# EAGLE board CT_schematic (EAGLE 7.6.0)

Size 100 x 80 mm. Coordinates in mm from the lower left corner, seen from the top.
Outline: 0,0 100,0 100,80 0,80 0,0
Copper layers (1*16): Top 0.035mm / dielectric 1.5mm / Bottom 0.035mm
Design rules "default": minimum track width 10mil, minimum drill 24mil, track to track 8mil, track to pad 8mil, pad to pad 8mil, via to via 8mil, smd to smd 8mil, copper to edge 40mil, drill to drill 8mil, minimum pad ring 10mil, minimum via ring 8mil, stop-mask expansion 4mil, vias tented up to drill 0mil, thermal gap 10mil

## Footprints (pad centres in the part's own frame; a part is rotated, then mirrored left to right if it is on the bottom)
C0603 = smd 0.8 x 0.8: 1 -0.762,0; 2 0.762,0
C0402 = smd 0.5 x 0.5: 1 -0.508,0; 2 0.508,0
EXV-9B = smd 2.718 x 1.778: 1 -2.108,0; 2 2.108,0
EXV-9H = smd 3.505 x 1.676: 1 -2.857,0; 2 2.857,0
L0603 = smd 0.8 x 0.8: 1 -0.762,0; 2 0.762,0
PJ-037B_PACKAGE = drill 3.7 square: 1 12,0 | drill 3.2 square: 2 6,0
R0603 = smd 0.8 x 0.8: 1 -0.762,0; 2 0.762,0
TFBGA64 = smd 0.35 x 0.35: A1 -1.75,1.75; A2 -1.25,1.75; A3 -0.75,1.75; A4 -0.25,1.75; A5 0.25,1.75; A6 0.75,1.75; A7 1.25,1.75; A8 1.75,1.75; B1 -1.75,1.25; B2 -1.25,1.25; B3 -0.75,1.25; B4 -0.25,1.25; B5 0.25,1.25; B6 0.75,1.25; B7 1.25,1.25; B8 1.75,1.25; C1 -1.75,0.75; C2 -1.25,0.75; C3 -0.75,0.75; C4 -0.25,0.75; C5 0.25,0.75; C6 0.75,0.75; C7 1.25,0.75; C8 1.75,0.75; D1 -1.75,0.25; D2 -1.25,0.25; D3 -0.75,0.25; D4 -0.25,0.25; D5 0.25,0.25; D6 0.75,0.25; D7 1.25,0.25; D8 1.75,0.25; E1 -1.75,-0.25; E2 -1.25,-0.25; E3 -0.75,-0.25; E4 -0.25,-0.25; E5 0.25,-0.25; E6 0.75,-0.25; E7 1.25,-0.25; E8 1.75,-0.25; F1 -1.75,-0.75; F2 -1.25,-0.75; F3 -0.75,-0.75; F4 -0.25,-0.75; F5 0.25,-0.75; F6 0.75,-0.75; F7 1.25,-0.75; F8 1.75,-0.75; G1 -1.75,-1.25; G2 -1.25,-1.25; G3 -0.75,-1.25; G4 -0.25,-1.25; G5 0.25,-1.25; G6 0.75,-1.25; G7 1.25,-1.25; G8 1.75,-1.25; H1 -1.75,-1.75; H2 -1.25,-1.75; H3 -0.75,-1.75; H4 -0.25,-1.75; H5 0.25,-1.75; H6 0.75,-1.75; H7 1.25,-1.75; H8 1.75,-1.75
SOIC-8 = smd 1.6 x 0.6: 1 -2.7,1.905 | smd 1.55 x 0.6: 2 -2.7,0.635; 3 -2.7,-0.635; 4 -2.7,-1.905; 5 2.7,-1.905; 6 2.7,-0.635; 7 2.7,0.635; 8 2.7,1.905
MBH7BLZ02-109004 = smd 0.5 x 0.5: 1 0,0; 15 9.85,0; 27 9.85,8.45; 41 0,8.45 | smd 0.45 x 0.5: 2 0.725,0; 3 1.425,0; 4 2.125,0; 5 2.825,0; 6 3.525,0; 7 4.225,0; 8 4.925,0; 9 5.625,0; 10 6.325,0; 11 7.025,0; 12 7.725,0; 13 8.425,0; 14 9.125,0 | smd 0.5 x 0.45: 16 9.85,0.725; 17 9.85,1.425; 18 9.85,2.125; 19 9.85,2.825; 20 9.85,3.525; 21 9.85,4.225; 22 9.85,4.925; 23 9.85,5.625; 24 9.85,6.325; 25 9.85,7.025; 26 9.85,7.725; 28 9.15,8.45; 29 8.45,8.45; 30 7.75,8.45; 31 7.05,8.45; 32 6.35,8.45; 33 5.65,8.45; 34 4.95,8.45; 35 4.25,8.45; 36 3.55,8.45; 37 2.85,8.45; 38 2.15,8.45; 39 1.45,8.45; 40 0.75,8.45; 42 0,7.75; 43 0,7.05; 44 0,6.35; 45 0,5.65; 46 0,4.95; 47 0,4.25; 48 0,3.55; 49 0,2.85; 50 0,2.15; 51 0,1.45; 52 0,0.75 | smd 3 x 2.5: 53 3.225,2.775; 54 6.625,2.775; 55 6.625,5.675; 56 3.225,5.675
DFN8-S = smd 0.6 x 0.4: 1 -2.69,1.905; 2 -2.69,0.635; 3 -2.69,-0.635; 4 -2.69,-1.905; 5 2.69,-1.905; 6 2.69,-0.635; 7 2.69,0.635; 8 2.69,1.905
ASEK = smd 1.4 x 1: 1 -1.1,-0.8; 2 1.1,-0.8; 3 1.1,0.8; 4 -1.1,0.8
ASFL1 = smd 1.7 x 1.5: 1 -1.27,-1.1; 2 1.27,-1.1; 3 1.27,1.1; 4 -1.27,1.1
LP2954 = smd 1.6 x 0.6: 1 -2.475,1.905 | smd 1.55 x 0.6: 2 -2.475,0.635; 3 -2.475,-0.635; 4 -2.475,-1.905; 5 2.475,-1.905; 6 2.475,-0.635; 7 2.475,0.635; 8 2.475,1.905
SON-6 = smd 0.55 x 0.3: 1 -0.355,0.5 | smd 0.52 x 0.3: 2 -0.37,0; 3 -0.37,-0.5; 4 0.37,-0.5; 5 0.37,0; 6 0.37,0.5
SW_4-1437565-2 = smd 1.4 x 2.1: 1 -2.23,4.55; 2 -2.23,-4.55; 3 2.23,4.55; 4 2.23,-4.55
LGM67K-G1J2-24-Z = smd 0.8 x 1.4: A -2,0; C 0,0
NC7SZ125M5X = smd 1.3 x 0.7: 1 -1.3,0.95; 2 -1.3,0; 3 -1.3,-0.95; 4 1.3,-0.95; 5 1.3,0.95

## Placement (x,y rotation side)
C1  1e-07  [C0603]  -38.1,59.69 0 top  (outside the outline)
C2  1e-07  [C0603]  -41.91,59.69 0 top  (outside the outline)
C3  1e-07  [C0603]  -45.72,59.69 0 top  (outside the outline)
C4  1e-07  [C0603]  -49.53,59.69 0 top  (outside the outline)
C5  4.7e-06  [C0603]  -34.29,59.69 0 top  (outside the outline)
C6  1e-07  [C0603]  -53.34,59.69 0 top  (outside the outline)
C7  1e-08  [C0603]  -57.15,59.69 0 top  (outside the outline)
C8  1e-06  [C0603]  -60.96,59.69 0 top  (outside the outline)
C9  1e-08  [C0402]  -41.91,64.77 0 top  (outside the outline)
C10  1e-07  [C0402]  -45.72,64.77 0 top  (outside the outline)
C11  1e-07  [C0402]  -49.53,64.77 0 top  (outside the outline)
C12  1e-08  [C0402]  -53.34,64.77 0 top  (outside the outline)
C13  1e-08  [C0402]  -57.15,64.77 0 top  (outside the outline)
C14  1e-08  [C0402]  -60.96,64.77 0 top  (outside the outline)
C15  1e-06  [EXV-9B]  -30.48,46.99 0 top  (outside the outline)
C16  2.2e-06  [EXV-9B]  -39.37,46.99 0 top  (outside the outline)
C17  1e-07  [C0402]  -64.77,64.77 0 top  (outside the outline)
C18  0.0001  [EXV-9H]  -38.1,40.64 0 top  (outside the outline)
C19  0.0001  [EXV-9H]  -49.53,40.64 0 top  (outside the outline)
C20  1e-08  [C0402]  -15.24,69.85 0 top  (outside the outline)
C21  1e-08  [C0402]  -19.05,69.85 0 top  (outside the outline)
F1  240.0  [L0603]  -15.24,64.77 0 top  (outside the outline)
J1  PJ-037B  [PJ-037B_PACKAGE]  -27.94,7.62 0 top  (outside the outline)
R2  1000.0  [R0603]  -19.05,64.77 0 top  (outside the outline)
R4  4700.0  [R0603]  -22.86,64.77 0 top  (outside the outline)
R5  4700.0  [R0603]  -26.67,64.77 0 top  (outside the outline)
R6  2200.0  [R0603]  -30.48,64.77 0 top  (outside the outline)
R7  2200.0  [R0603]  -34.29,64.77 0 top  (outside the outline)
R8  10000.0  [R0603]  -40.64,54.61 0 top  (outside the outline)
R9  10000.0  [R0603]  -45.72,54.61 0 top  (outside the outline)
R10  10000.0  [R0603]  -50.8,54.61 0 top  (outside the outline)
R11  10000.0  [R0603]  -55.88,54.61 0 top  (outside the outline)
R12  10000.0  [R0603]  -60.96,54.61 0 top  (outside the outline)
R13  10000.0  [R0603]  -15.24,59.69 0 top  (outside the outline)
R14  10000.0  [R0603]  -20.32,59.69 0 top  (outside the outline)
R15  100000.0  [R0603]  -15.24,54.61 0 top  (outside the outline)
R16  100000.0  [R0603]  -20.32,54.61 0 top  (outside the outline)
R17  164658.62  [R0603]  -60.96,46.99 0 top  (outside the outline)
R18  100000.0  [R0603]  -25.4,54.61 0 top  (outside the outline)
R19  10000.0  [R0603]  -25.4,59.69 0 top  (outside the outline)
R20  10000.0  [R0603]  -30.48,59.69 0 top  (outside the outline)
R21  9100.0  [R0603]  -38.1,64.77 0 top  (outside the outline)
R22  680000.0  [R0603]  -30.48,54.61 0 top  (outside the outline)
R23  120000.0  [R0603]  -35.56,54.61 0 top  (outside the outline)
U1  STM32L152R8H6A  [TFBGA64]  -58.42,19.05 0 top  (outside the outline)
U2  AT25160B-SSHL-T  [SOIC-8]  -41.91,31.75 0 top  (outside the outline)
U3  MBH7BLZ02-109004  [MBH7BLZ02-109004]  -52.07,1.27 0 top  (outside the outline)
U4  24AA256-I/MF  [DFN8-S]  -41.91,20.32 0 top  (outside the outline)
U5  ASEK-32.768KHz-ECST  [ASEK]  -29.21,40.64 0 top  (outside the outline)
U6  ASFL1-25MHZ-NCS  [ASFL1]  -59.69,30.48 0 top  (outside the outline)
U7  LP2954AIMX/NOPB  [LP2954]  -25.4,31.75 0 top  (outside the outline)
U8  TPS3895ADRYR  [SON-6]  -21.59,68.58 0 top  (outside the outline)
U9  4-1437565-2  [SW_4-1437565-2]  -27.94,20.32 0 top  (outside the outline)
U10  Q65110A2395  [LGM67K-G1J2-24-Z]  -17.78,48.26 0 top  (outside the outline)
U11  nc7sz125m5x  [NC7SZ125M5X]  -46.99,46.99 0 top  (outside the outline)
U12  nc7sz125m5x  [NC7SZ125M5X]  -53.34,46.99 0 top  (outside the outline)

## Library data of the parts
C1-C21 F1 J1 R2 R4-R23 U1-U12 = circuit_tree

## Nets
CLK_U1_A1: U1.A1 U5.3
CLK_U1_C1: U1.C1 U6.3
GND: C1.2 C2.2 C3.2 C4.2 C5.2 C6.2 C7.2 C8.2 C9.2 C10.2 C11.2 C12.2 C13.2 C14.2 C15.2 C16.2 C17.2 C18.2 C19.2 C20.2 C21.2 J1.2 R2.2 R8.2 R13.2 R18.2 R21.2 R23.2 U1.C2 U1.D4 U1.D5 U1.D6 U1.F1 U2.4 U3.1 U3.3 U3.15 U3.27 U3.29 U3.41 U3.42 U3.43 U3.44 U3.45 U3.46 U3.47 U3.48 U3.49 U3.50 U3.52 U3.53 U3.54 U3.55 U3.56 U4.4 U5.2 U6.2 U7.4 U8.2 U10.C U11.1 U11.3 U12.1 U12.3
NET_U1_A3: R7.1 U1.A3 U4.5
NET_U1_B2: C6.1 U1.B2
NET_U1_B3: R6.1 U1.B3 U4.6
NET_U1_B4: R8.1 U1.B4
NET_U1_E1: R5.1 U1.E1 U12.4
NET_U1_H1: C7.1 C8.1 F1.1 U1.G1 U1.H1
NET_U1_H7: U10.A
NET_U1_H8: U9.3 U9.4
NET_U2_3: R9.1 U2.3
NET_U2_7: R11.1 U2.7
NET_U3_39: R4.1 U3.39 U11.4
NET_U4_1: R12.1 U4.1
NET_U4_2: R13.1 U4.2
NET_U4_3: R14.1 U4.3
NET_U7_3: R16.1 U7.3
NET_U7_5: R15.1 U7.5
NET_U7_7: R17.2 R18.1 U7.7
NET_U8_1: R20.1 R21.1 U8.1
NET_U8_3: R22.2 R23.1 U8.3
NET_U8_4: R19.1 U8.4 U11.2 U12.2
NET_U9_1: R2.1 U9.1 U9.2
PROC_SPI1_MISO: U1.A4 U2.2
PROC_SPI1_MOSI: U1.C4 U2.5
PROC_SPI1_NSS: R10.1 U1.A6 U2.1
PROC_SPI1_SCK: U1.A5 U2.6
PROC_USART1_CTS: U1.C8 U3.26
PROC_USART1_RTS: U1.B8 U3.24
PROC_USART1_RX: U1.C3 U3.25
PROC_USART1_TX: U1.C7 U3.23
VCC_S1_6V0: C15.1 C18.1 C19.1 J1.1 R16.2 U7.8
VCC_TIER1_3V3: C1.1 C2.1 C3.1 C4.1 C5.1 C9.1 C10.1 C11.1 C12.1 C13.1 C14.1 C16.1 C17.1 C20.1 C21.1 F1.2 R4.2 R5.2 R6.2 R7.2 R9.2 R10.2 R11.2 R12.2 R14.2 R15.2 R17.1 R19.2 R20.2 R22.1 U1.D2 U1.E4 U1.E5 U1.E6 U2.8 U3.28 U4.7 U4.8 U5.4 U6.4 U7.1 U8.6 U11.5 U12.5

## Tracks (layer width: path | path; a pad name or v marks a point on that pad's centre or on a via)
CLK_U1_A1  (1 unrouted)
CLK_U1_C1  (1 unrouted)
GND  (63 unrouted)
NET_U1_A3  (2 unrouted)
NET_U1_B2  (1 unrouted)
NET_U1_B3  (2 unrouted)
NET_U1_B4  (1 unrouted)
NET_U1_E1  (2 unrouted)
NET_U1_H1  (4 unrouted)
NET_U1_H8  (1 unrouted)
NET_U2_3  (1 unrouted)
NET_U2_7  (1 unrouted)
NET_U3_39  (2 unrouted)
NET_U4_1  (1 unrouted)
NET_U4_2  (1 unrouted)
NET_U4_3  (1 unrouted)
NET_U7_3  (1 unrouted)
NET_U7_5  (1 unrouted)
NET_U7_7  (2 unrouted)
NET_U8_1  (2 unrouted)
NET_U8_3  (2 unrouted)
NET_U8_4  (3 unrouted)
NET_U9_1  (2 unrouted)
PROC_SPI1_MISO  (1 unrouted)
PROC_SPI1_MOSI  (1 unrouted)
PROC_SPI1_NSS  (2 unrouted)
PROC_SPI1_SCK  (1 unrouted)
PROC_USART1_CTS  (1 unrouted)
PROC_USART1_RTS  (1 unrouted)
PROC_USART1_RX  (1 unrouted)
PROC_USART1_TX  (1 unrouted)
VCC_S1_6V0  (5 unrouted)
VCC_TIER1_3V3  (43 unrouted)